# Altium PCB PCB1.PcbDoc
Units mm, origin at the board's own origin, x right, y up, seen from the top; angles counter-clockwise.
Board outline 32 x 86 mm, 2 copper layers (Top Layer, Bottom Layer); 78 components, 52 nets, 247 pads, 30 vias.
Unrouted connection lines stored in the file: 5.
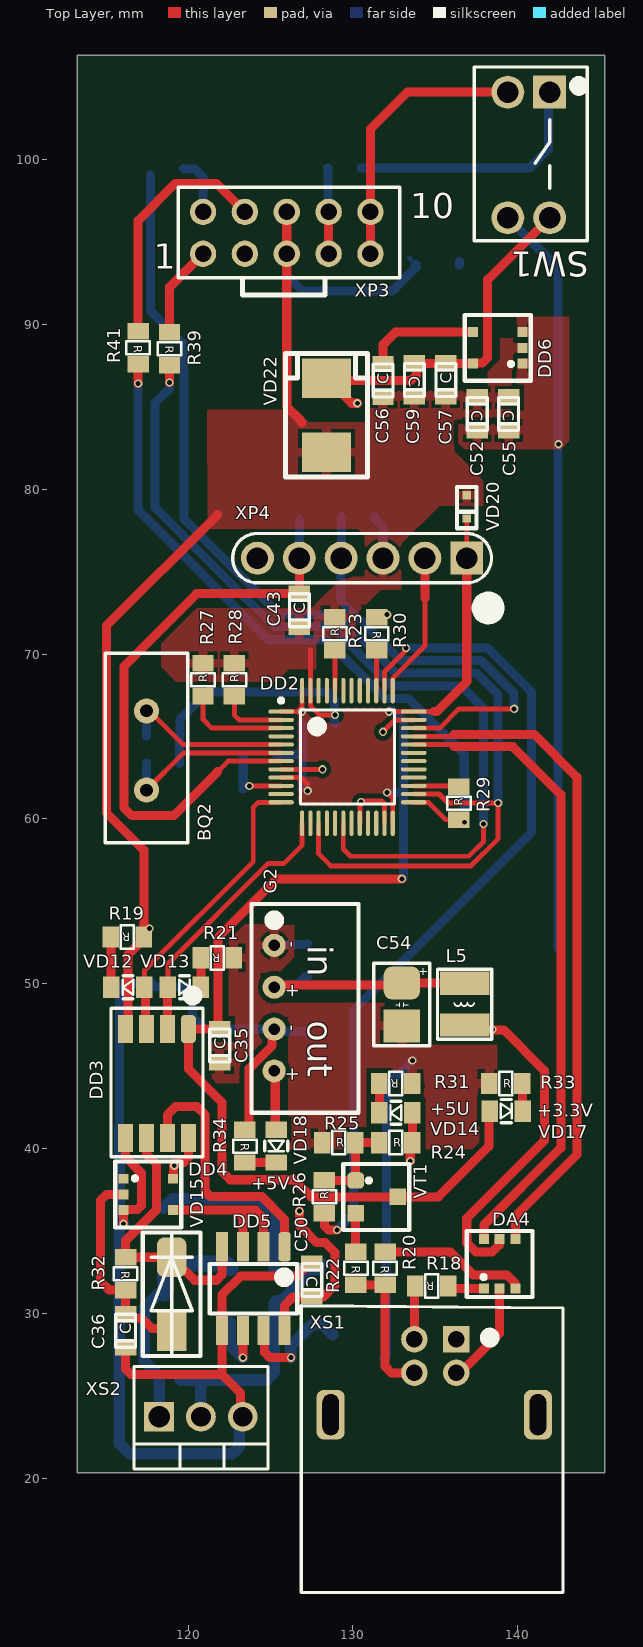
[diagram p0: Top Layer view]
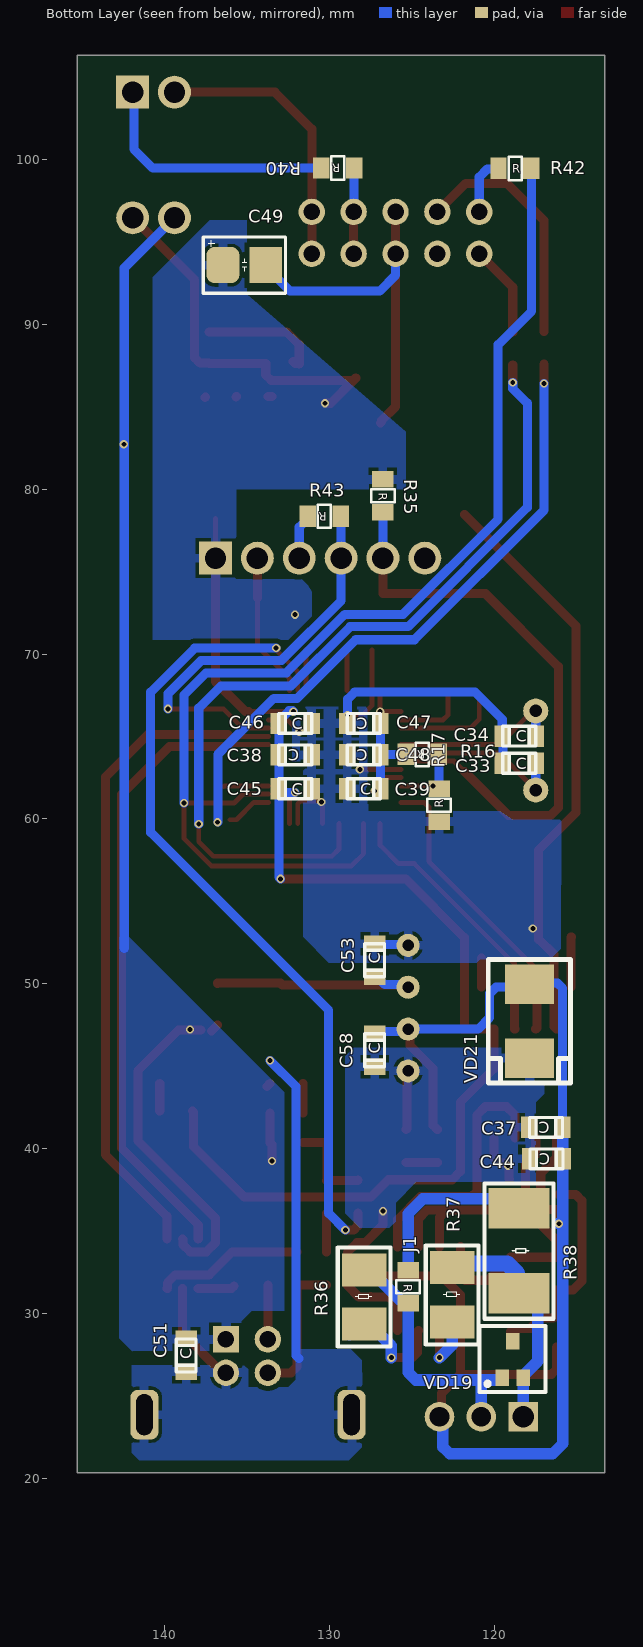
[diagram p1: Bottom Layer view, seen from below]
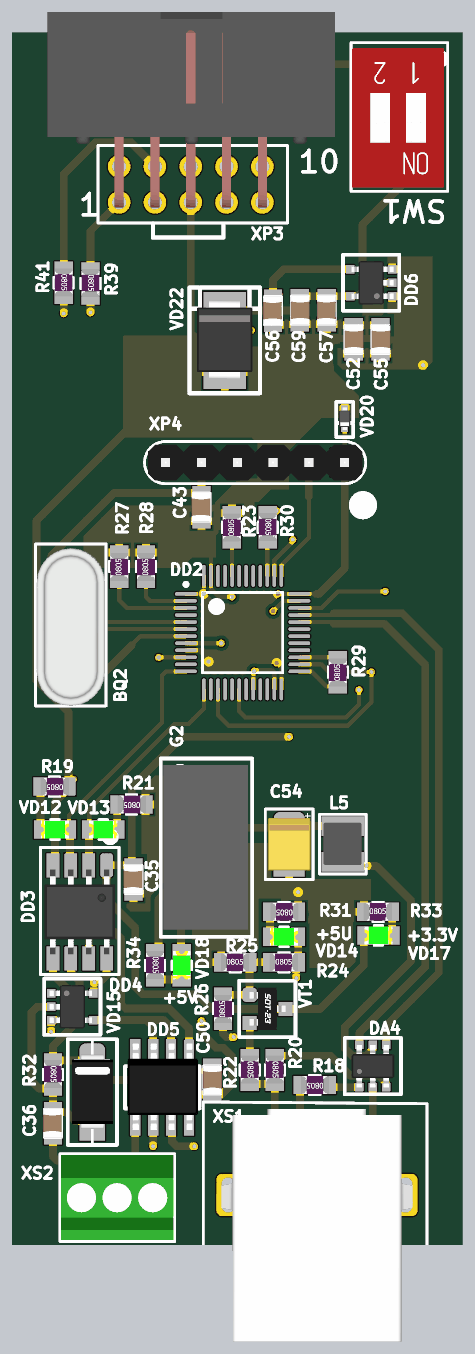
[diagram p2: 3D render of the assembled board from above, using the file's embedded part models]
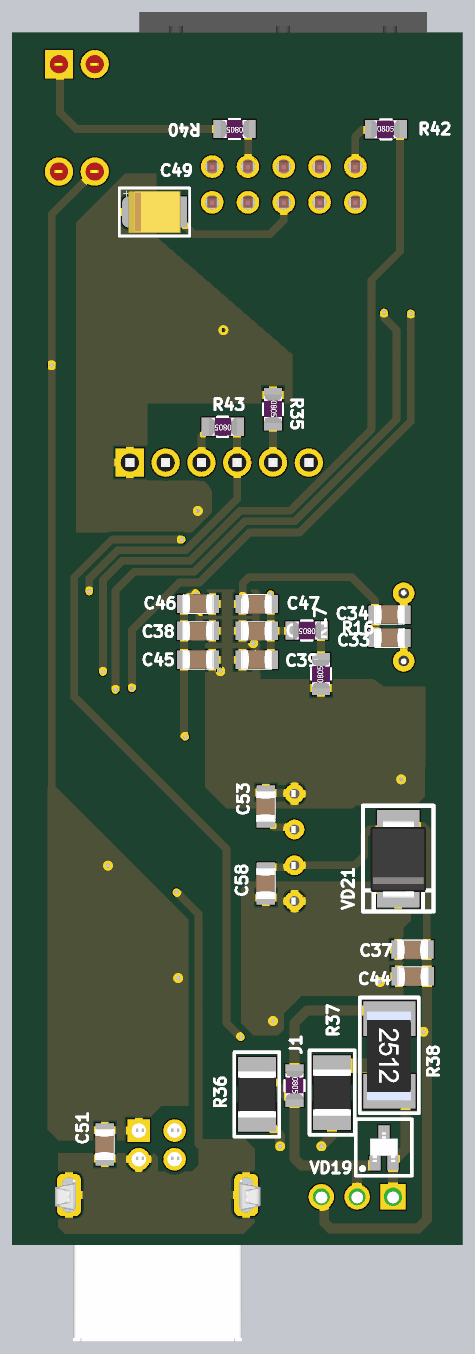
[diagram p3: 3D render of the assembled board from below, using the file's embedded part models]

## Layer stack, top to bottom
Top Solder: solder mask 0.0102, Solder Resist, Dk 3.5
Top Layer: signal copper 0.0356
Dielectric 1: dielectric 0.32, FR-4, Dk 4.8
Bottom Layer: signal copper 0.0356
Bottom Solder: solder mask 0.0102, Solder Resist, Dk 3.5

## Board outline
113.284,20.32 113.284,106.32 145.284,106.32 145.284,20.32

## Design rules (kind name [scope] priority, off if disabled: settings)
Clearance [All] p1: gap=0.2 ignorepadtopadclearanceinfootprint=FALSE except(0.3: Arc-Poly Track-Poly SMDPad-Poly THPad-Poly Via-Poly Fill-Poly Poly-Poly)
MinimumSolderMaskSliver [All] p1: minsoldermaskwidth=0
PolygonConnect [All] p1: thpad.connectstyle=Relief thpad.reliefconductorwidth=0.55 thpad.reliefentries=4 thpad.polygonreliefangle="90 Angle" thpad.airgapwidth=0.2 smdpad.connectstyle=Relief smdpad.reliefconductorwidth=0.55 smdpad.reliefentries=4 smdpad.polygonreliefangle="90 Angle" smdpad.airgapwidth=0.2 via.connectstyle=Direct via.reliefconductorwidth=0.55 via.reliefentries=4 via.polygonreliefangle="90 Angle" via.airgapwidth=0.2
RoutingVias [All] p1: holewidth=0.711 width=1.27 viastyle="Through Hole" minholewidth=0.711 minwidth=1.27 maxholewidth=0.711 maxwidth=1.27
SilkToSilkClearance [All] p1: silktosilkclearance=0
SilkToSolderMaskClearance [IsPad] p1: minsilkscreentomaskgap=0 clearancetoexposedcopper=TRUE
SolderMaskExpansion [All] p1: expansion=0.102
Width [All] p1: maxlimit=1 minlimit=0.3 preferedwidth=0.55 minimp=50.000000 maximp=50.000000 favimp=50.000000
27 further rules are at their usual default settings.

## Components (designator, comment, footprint, x,y, rotation, side; value= is the part's Value field where it differs from the comment)
BQ2 "8Mhz" Xtal 117.475,66.548 r270 top
C33 "" CAP_0805_(2x1.25x1.3) 119.475,63.373 r180 bottom
C34 "" CAP_0805_(2x1.25x1.3) 119.475,65.024 r180 bottom
C35 "0805" CAP_0805_(2x1.25x1.3) 121.92,45.244 r90 top
C36 "0805" CAP_0805_(2x1.25x1.3) 116.205,27.94 r90 top locked
C37 "0805" CAP_0805_(2x1.25x1.3) 115.856,41.275 r0 bottom locked
C38 "0.1u" CAP_0805_(2x1.25x1.3) 131.064,63.881 r0 bottom
C39 "0.1u" CAP_0805_(2x1.25x1.3) 128.905,61.826 r180 bottom
C43 "0.1u" CAP_0805_(2x1.25x1.3) 126.746,71.66 r90 top
C44 "0805" CAP_0805_(2x1.25x1.3) 115.824,39.37 r0 bottom locked
C45 "10n" CAP_0805_(2x1.25x1.3) 133.064,61.826 r180 bottom
C46 "10n" CAP_0805_(2x1.25x1.3) 133.064,65.786 r180 bottom
C47 "1u" CAP_0805_(2x1.25x1.3) 126.905,65.786 r0 bottom
C48 "1u" CAP_0805_(2x1.25x1.3) 126.905,63.881 r0 bottom
C49 "TAN_A" CAP_TAN_B 136.458,93.599 r180 bottom
C50 "0805" CAP_0805_(2x1.25x1.3) 127.508,33.02 r270 top
C51 "0.1u" CAP_0805_(2x1.25x1.3) 138.684,26.441 r90 bottom
C52 "0805" CAP_0805_(2x1.25x1.3) 137.541,85.566 r270 top
C53 "1u" CAP_0805_(2x1.25x1.3) 127.254,50.419 r90 bottom
C54 "TAN_A" CAP_TAN_B 132.969,50.038 r270 top
C55 "0805" CAP_0805_(2x1.25x1.3) 139.446,85.566 r270 top
C56 "0805" CAP_0805_(2x1.25x1.3) 131.826,85.598 r90 top
C57 "0805" CAP_0805_(2x1.25x1.3) 135.636,85.63 r90 top
C58 "1u" CAP_0805_(2x1.25x1.3) 127.254,44.958 r90 bottom
C59 "1u" CAP_0805_(2x1.25x1.3) 133.727,87.63 r270 top
DA4 "DA_USBLC6-2SC6" SOT-23-6L 137.953,31.496 r0 top
DD2 "DD_STM32F103CBT6" LQFP_48 129.667,63.754 r0 top
DD3 "SCM3721ASA" SOP-8 120.015,47.244 r270 top locked
DD4 "74HC1G14GV" sot-23-5 116.078,38.161 r270 top locked
DD5 "ST3485EBDR" SO-8_(0.15') 125.817,34.086 r270 top locked
DD6 "LD3985M33R" sot-23-5 140.287,87.63 r90 top
G2 "AM1S-Z" AM1S-Z 125.222,52.324 r270 top
J1 "0805" RES_0805_(2x1.2x0.45)_0.125Вт 125.222,32.612 r270 bottom locked
L5 "SRN3015-100M" L_SRN3015 136.779,47.498 r90 top
R16 "0805" RES_0805_(2x1.2x0.45)_0.125Вт 123.349,63.906 r0 bottom
R17 "0805" RES_0805_(2x1.2x0.45)_0.125Вт 123.342,59.824 r90 bottom
R18 "0805" RES_0805_(2x1.2x0.45)_0.125Вт 135.782,31.655 r180 top
R19 "0805" RES_0805_(2x1.2x0.45)_0.125Вт 117.316,52.832 r180 top
R20 "0805" RES_0805_(2x1.2x0.45)_0.125Вт 131.953,33.723 r270 top
R21 "0805" RES_0805_(2x1.2x0.45)_0.125Вт 122.777,51.562 r180 top
R22 "0805" RES_0805_(2x1.2x0.45)_0.125Вт 130.175,33.723 r270 top
R23 "0805" RES_0805_(2x1.2x0.45)_0.125Вт 128.905,70.231 r90 top
R24 "0805" RES_0805_(2x1.2x0.45)_0.125Вт 131.604,40.359 r0 top
R25 "0805" RES_0805_(2x1.2x0.45)_0.125Вт 128.143,40.359 r0 top
R26 "0805" RES_0805_(2x1.2x0.45)_0.125Вт 128.27,36.073 r90 top
R27 "0805" RES_0805_(2x1.2x0.45)_0.125Вт 120.904,67.437 r90 top
R28 "0805" RES_0805_(2x1.2x0.45)_0.125Вт 122.809,67.437 r90 top
R29 "0805" RES_0805_(2x1.2x0.45)_0.125Вт 136.423,59.951 r90 top
R30 "0805" RES_0805_(2x1.2x0.45)_0.125Вт 131.445,72.231 r270 top
R31 "3.3k" RES_0805_(2x1.2x0.45)_0.125Вт 133.604,43.942 r180 top
R32 "0805" RES_0805_(2x1.2x0.45)_0.125Вт 116.205,33.401 r270 top locked
R33 "0805" RES_0805_(2x1.2x0.45)_0.125Вт 138.278,43.942 r0 top
R34 "3.3k" RES_0805_(2x1.2x0.45)_0.125Вт 123.444,41.148 r270 top
R35 "0805" RES_0805_(2x1.2x0.45)_0.125Вт 126.746,80.613 r270 bottom
R36 "1210" RES_1210_(3.2x2.5x0.55)_0.5Вт 127.889,29.339 r90 bottom locked
R37 "1210" RES_1210_(3.2x2.5x0.55)_0.5Вт 122.555,29.464 r90 bottom locked
R38 "2512" RES_2512_(6.3x3.1x0.6)_2Вт 118.491,36.365 r270 bottom locked
R39 "0805" RES_0805_(2x1.2x0.45)_0.125Вт 118.872,89.535 r270 top
R40 "0805" RES_0805_(2x1.2x0.45)_0.125Вт 128.486,99.488 r0 bottom
R41 "0805" RES_0805_(2x1.2x0.45)_0.125Вт 116.967,89.583 r270 top
R42 "0805" RES_0805_(2x1.2x0.45)_0.125Вт 119.736,99.466 r180 bottom
R43 "0805" RES_0805_(2x1.2x0.45)_0.125Вт 129.318,78.359 r0 bottom
SW1 "SW_2_pin" SW_DS1040_2pin 134.315,104.089 r0 top locked
VD12 "VD_Led_0805" led_0805 117.348,49.784 r180 top
VD13 "VD_Led_0805" led_0805 118.777,49.784 r0 top
VD14 "VD_Led_0805" led_0805 133.604,42.164 r180 top
VD15 "VD" VD_SMA_(Do-214AC) 118.999,28.901 r90 top locked
VD17 "VD_Led_0805" led_0805 138.303,42.266 r0 top
VD18 "VD_Led_0805" led_0805 125.349,41.148 r270 top
VD19 "ESDA25W" SOT-323-3L 119.888,25.974 r180 bottom locked
VD20 "ESD" VD_SOD523 136.906,79.629 r270 top
VD21 "SMBJ5.0A" VD_SMB_(Do-214AA) 117.856,49.966 r270 bottom
VD22 "SMBJ5.0A" VD_SMB_(Do-214AA) 128.397,82.241 r90 top
VT1 "BC847B" SOT-23 130.165,38.057 r270 top
XP3 "XP_5x2_H" XP_5x2_PIN_H 120.904,94.285 r0 top locked
XP4 "XP_6_pin" XP_6_Pin 136.906,75.819 r180 top
XS1 "XS_USB_B" XS_USBB 133.731,28.421 r0 top locked
XS2 "XS_3_pin_2.54" XS_KLS-2.54-03P 118.237,23.722 r0 top locked

## Footprints (in the part's own frame and the unit in brackets; to place one, negate y for a bottom-side part, rotate by r counter-clockwise, add the part's x,y. Pads: shape width x height; smd on the part's side, far side on the other; paste and mask are expansions set on the pad)
AM1S-Z [mm] "DC/DC Aimtec"
  round 1.4 hole 0.701: 1(0,0) 2(2.54,0) 3(5.08,0) 4(7.62,0)
  silkscreen extent -2.5,-1.38 10.16,5.12, body extent -2.03,-1.17 9.65,4.83, height 10.35
CAP_0805_(2x1.25x1.3) [mm]
  rect 1x1.3 smd: 1(0,0) 2(2,0)
  silkscreen extent 0,-0.6 2,0.6, body extent -0.05,-0.65 2.05,0.7, height 0.95
CAP_TAN_B [mm]
  rrect50% 2x2.2 smd: 1(0,0)
  rect 2x2.2 smd: 2(2.6,0)
  silkscreen extent -1.2,-1.7 3.8,1.7, body extent -0.55,-1.5 3.15,1.5, height 2.1
L_SRN3015 [mm]
  rect 1.4x3 smd: 1(0,0) 2(2.525,0)
  silkscreen extent -0.87,-1.65 3.37,1.65, body extent -0.24,-1.34 2.78,1.39, height 1.5
led_0805 [mm]
  rect 1x1.3 smd: 1(0,0) 2(2,0)
  silkscreen extent 0.67,-0.7 1.32,0.7, body extent 0,-0.62 2,0.62, height 1.1
LQFP_48 [mm] "Thin QFP, 48-Leads, Body 7x7mm, Pitch 0.5mm, IPC High Density"
  oval 1.55x0.25 smd: 1(-4.025,2.75) 2(-4.025,2.25) 3(-4.025,1.75) 4(-4.025,1.25) 5(-4.025,0.75) 6(-4.025,0.25) 7(-4.025,-0.25) 8(-4.025,-0.75) 9(-4.025,-1.25) 10(-4.025,-1.75) 11(-4.025,-2.25) 12(-4.025,-2.75) 25(4.025,-2.75) 26(4.025,-2.25) 27(4.025,-1.75) 28(4.025,-1.25) 29(4.025,-0.75) 30(4.025,-0.25) 31(4.025,0.25) 32(4.025,0.75) 33(4.025,1.25) 34(4.025,1.75) 35(4.025,2.25) 36(4.025,2.75)
  oval 0.25x1.55 smd: 13(-2.75,-4.025) 14(-2.25,-4.025) 15(-1.75,-4.025) 16(-1.25,-4.025) 17(-0.75,-4.025) 18(-0.25,-4.025) 19(0.25,-4.025) 20(0.75,-4.025) 21(1.25,-4.025) 22(1.75,-4.025) 23(2.25,-4.025) 24(2.75,-4.025) 37(2.75,4.025) 38(2.25,4.025) 39(1.75,4.025) 40(1.25,4.025) 41(0.75,4.025) 42(0.25,4.025) 43(-0.25,4.025) 44(-0.75,4.025) 45(-1.25,4.025) 46(-1.75,4.025) 47(-2.25,4.025) 48(-2.75,4.025)
  silkscreen extent -4.15,-2.85 2.85,3.55, body extent -3.5,-3.5 3.5,3.5, height 1.6
RES_0805_(2x1.2x0.45)_0.125Вт [mm]
  rect 1x1.3 smd: 1(0,0) 2(2,0)
  silkscreen extent 0.61,-0.71 1.4,0.71, body extent -0.02,-0.62 1.98,0.63, height 0.61
RES_1210_(3.2x2.5x0.55)_0.5Вт [mm]
  rect 2x2.7 smd: 1(0,0) 2(3.3,0)
  silkscreen extent -1.35,-1.6 4.65,1.6, body extent 0,-1.35 3.3,1.35, height 0.6
RES_2512_(6.3x3.1x0.6)_2Вт [mm]
  rect 2.45x3.7 smd: 1(0,0) 2(5.15,0)
  silkscreen extent -1.5,-2.1 6.7,2.1, body extent -0.51,-1.6 5.79,1.55, height 0.82
SO-8_(0.15') [mm]
  rrect50% 1.78x0.73 smd: 1(0.05,0.04)
  rect 1.78x0.73 smd: 2(0.05,-1.23) 3(0.05,-2.5) 4(0.05,-3.77) 5(5.13,-3.77) 6(5.13,-2.5) 7(5.13,-1.23) 8(5.13,0.04)
  silkscreen extent 1.1,-4.5 4.1,0.8, body extent -0.53,-4.32 5.63,0.68, height 2
SOP-8 [mm]
  rrect50% 1.7x0.9 smd: 1(0,0)
  rect 1.7x0.9 smd: 2(0,-1.27) 3(0,-2.54) 4(0,-3.81) 5(6.604,-3.81) 6(6.604,-2.54) 7(6.604,-1.27) 8(6.604,0)
  silkscreen extent -2.33,-4.7 7.75,0.89, body extent 0.28,-4.42 6.32,0.61, height 1.6
SOT-23 [mm]
  rrect50% 1x1 smd: 1(0,0)
  rect 1x1 smd: 2(2,0) 3(1,2.55)
  silkscreen extent -1,-0.75 3,3.25, body extent -0.5,0 2.5,2.55, height 1
sot-23-5 [mm]
  rect 0.6x0.6 smd: 1(0,0) 2(0.95,0) 3(1.9,0) 4(1.9,3) 5(0,3)
  silkscreen extent -1.05,-0.5 2.95,3.5, body extent -0.6,-0.1 2.5,3.1, height 1.45
SOT-23-6L [mm]
  rect 0.6x0.6 smd: 1(0,0) 2(0.95,0) 3(1.9,0) 4(1.9,3) 5(0.95,3) 6(0,3)
  silkscreen extent -1.05,-0.5 2.95,3.5, body extent -0.57,0 2.47,3, height 1.45
SOT-323-3L [mm]
  rect 0.8x1 smd: 1(0.381,0.127) 2(1.651,0.127) 3(1.016,2.32)
  silkscreen extent -1,-0.75 3,3.25, body extent 0.02,0.22 2.02,2.32, height 0.9
SW_DS1040_2pin [mm] "Switch"
  rect 2x2 hole 1.3: 1(7.62,0)
  round 2 hole 1.3: 2(5.08,0) 3(5.08,-7.62) 4(7.62,-7.62)
  silkscreen extent 3.05,-9.02 9.91,1.52, body extent 3.11,-8.76 9.65,1.14, height 6.8
VD_SMA_(Do-214AC) [mm]
  rect 2.4x1.8 smd: 1(0,0)
  rrect50% 2.4x1.8 smd: 2(4.5,0)
  silkscreen extent -1.5,-1.75 6,1.75, body extent -0.37,-1.47 4.92,1.45, height 2.41
VD_SMB_(Do-214AA) [mm]
  rect 2.4x3 smd: 1(0,0) 2(4.5,0)
  silkscreen extent -1.5,-2.5 6,2.5, body extent -0.5,-1.97 5.1,1.98, height 2.65
VD_SOD523 [mm]
  rect 0.5x0.5 smd: 1(0,0) 2(1.4,0)
  silkscreen extent -0.5,-0.6 2,0.6, body extent -0.1,-0.4 1.5,0.4, height 0.7
XP_5x2_PIN_H [mm]
  round 1.6 hole 1: 1(0,0) 2(0,2.54) 3(2.54,0) 4(2.54,2.54) 5(5.08,0) 6(5.08,2.54) 7(7.62,0) 8(7.62,2.54) 9(10.16,0) 10(10.16,2.54)
  silkscreen extent -1.5,-2.5 11.94,4.04, body extent -5.07,-0.36 15.33,13.52, height 9.35
XP_6_Pin [mm]
  rect 2x2 hole 1.3: 1(0,0)
  round 2 hole 1.3: 2(2.54,0) 3(5.08,0) 4(7.62,0) 5(10.16,0) 6(12.7,0)
  silkscreen extent -1.5,-1.5 14.2,1.5, body extent -1.27,-1.27 13.97,1.27, height 9.05
XS_KLS-2.54-03P [mm]
  rect 1.8x1.8 hole 1.3: 1(0,0)
  round 1.8 hole 1.2: 2(2.54,0) 3(5.08,0)
  silkscreen extent -1.52,-3.17 6.6,3.05, body extent -1.46,-3.05 6.54,2.97, height 7.83
XS_USBB [mm]
  rect 1.6x1.6 hole 1: 1(2.54,0)
  round 1.6 hole 1: 2(0,0) 3(0,-2.032) 4(2.54,-2.032)
  rrect50% 1.7x3 hole 2.5 slot 1 at 0 deg: 5(7.493,-4.572) 6(-5.08,-4.572)
  silkscreen extent -6.86,-15.37 9.02,2.03, body extent -6.1,-14.98 8.5,1.52, height 11.28
Xtal [mil]
  round 60 hole 30: 1(0,0) 2(188.98,0)
  silkscreen extent -138,-98 315,98, body extent -126,-95 315,95, height 157

## Part data
BQ2: library part Xtal, Наименование=8.00M-HC49-S
C33 C34 C35 C36 C37 C38 C39 C43 C44 C45 C46 C47 C48 C50 C51 C52 C53 C55 C56 C57 C58 C59: library part C_0805, "Керамика", Корпус=0805, Тип=Конденсатор
  C33 C34: Напряжение="50 В", Номинал=20pF
  C35 C37 C44 C50: Наименование=VJ0805Y104KXACW1BC, Номинал=0.1uF
  C36: Наименование=GRM216R71H102K, Номинал=1nF
  C38: Идентификатор=VJ0805Y104KXACW1BC, Наименование=VJ0805Y104KXACW1BC, Напряжение="50 В", Номинал=0.1u, Примечания=VJ0805Y104KXACW1BC
  C39 C43 C51: Идентификатор=VJ0805Y104KXACW1BC, Наименование=VJ0805Y104KXACW1BC, Напряжение="50 В", Номинал=0.1u
  C45 C46: Идентификатор=CC0805JRX7R9BB103, Наименование=CC0805JRX7R9BB103, Напряжение="50 В", Номинал=10n
  C47 C48: Идентификатор=CC0805JKX7R9BB105, Наименование=CC0805JRX7R9BB103, Напряжение="50 В", Номинал=1u
  C52: Наименование=CC0805JKX7R9BB105, Номинал=1uF
  C53 C58 C59: Идентификатор=CC0805JKX7R9BB105, Наименование=CC0805JKX7R9BB105, Напряжение="50 В", Номинал=1u
  C55 C57: Наименование=VJ0805Y104KXACW1BC, Номинал=100nF
  C56: Наименование=CC0805JRX7R9BB103, Номинал=10nF
C49 C54: library part C+_TAN_B, "Capacitor", Идентификатор=293D226X9010A2TE3, Корпус=A, Наименование=293D226X9010A2TE3, Напряжение="10 В", Номинал=22u, Тип="Конденсатор танталовый"
DA4: "USB ESD protector SOT23-6", Идентификатор=USBLC6-2SC6, Корпус=SOT23-6, Наименование=USBLC6-2SC6, Тип="ESD protector"
DD2: "STM32 ARM-based 32-bit MCU with 128 Kbytes Flash, 48-pin LQFP, Industrial Temperature", ComponentLink1Description="Manufacturer Link", ComponentLink1URL=www.st.com/stm32, ComponentLink2Description=Datasheet, ComponentLink2URL=http://www.st.com/stonline/products/literature/ds/13587.pdf, DatasheetVersion="rev6, Mar-2008", PackageDescription="48-Pin Low-Profile Quad Flat Pack, 7 x 7 mm Body, 0.5 mm Pitch (LQFP48)", PackageReference=LQFP48, PackageVersion=Mar-2008, Published=30-May-2008, Publisher="Altium Limited", Наименование=STM32F103CBT6
DD3: library part DD_SCM3721ASA, "Dual-ChannelDigital Isolators", Идентификатор=SCM3721ASA, Наименование=SCM3721ASA, Тип=SCM3721ASA
DD4: library part DD_74HC1G14GV, "1 канал инвертирующ триггер шмитта", Parameter 1=74HC1G14GV, Наименование=74HC1G14GV
DD5: library part DD_ST3485EBDR, "RS485/422 Приемопередатчик интерфейса", Наименование=ST3485EBDR, Тип=ST3485EBDR
DD6: library part DD_LD3985M33R, "Источник опорного напряжения 3.3В", Parameter 1=74HC1G14GV, Наименование=LD3985M33R
G2: library part G_AM1S-Z, "DC/DC", Идентификатор=B0505S-1WR3, Наименование=B0505S-1WR3, Напряжение="5 В", Тип="Источник питания DC/DC"
J1 R16 R17 R18 R19 R20 R21 R22 R23 R24 R25 R26 R27 R28 R29 R30 R31 R32 R33 R34 R35 R39 R40 R41 R42 R43: library part R_0805, "Resistor", Корпус=0805, Тип=Резистор
  J1 R39 R40 R41 R42: Идентификатор=-, Наименование=RC0805JR-0722RL, Номинал=22
  R16 R17: Идентификатор=-, Наименование=RC0805JR-074K7L, Номинал=4.7k
  R18 R20: Идентификатор=RC0805JR-070RL, Наименование=RC0805JR-070RL, Номинал=0
  R19 R21 R22 R33: Идентификатор=RC0805JR-071K5L, Наименование=RC0805JR-071K5L, Номинал="1.5 k"
  R23: Идентификатор=-, Наименование=RC0805JR-07100KL, Номинал=100k
  R24: Идентификатор=-, Наименование=RC0805JR-0710KL, Номинал="10 k"
  R25: Идентификатор=RC0805JR-0736KL, Наименование=RC0805JR-0736KL, Номинал="36 k"
  R26 R29: Идентификатор=-, Наименование=RC0805JR-07100RL, Номинал=100
  R27 R28: Идентификатор=-, Наименование=RC0805JR-0710KL, Номинал=10k
  R30: Идентификатор=-, Наименование=RC0805JR-070RL, Номинал=0
  R31: Идентификатор=RC0805JR-073K3L, Наименование=RC0805JR-073K3L, Номинал=3.3k
  R32: Наименование=RC0805JR-0722KL, Номинал=22k
  R34: Идентификатор=RC0805JR-073K3L, Наименование=RC0805JR-073K3L, Номинал="3.3 k"
  R35 R43: Идентификатор=RC0805JR-0710KL, Наименование=RC0805JR-0710KL, Номинал="10 k"
L5: library part L_SRN3015, "L", Идентификатор=SRN3015-100M, Наименование=SRN3015-100M, Номинал="10 мкГн, 1 А", Тип=Индуктивность
R36 R37: library part R_1210, "Resistor", Корпус=1210, Наименование=RC1210JR-072R7L, Номинал=2,7, Тип=Резистор
R38: library part R_2512, Корпус=2512, Наименование=RC2512JR-07120RL, Номинал=120, Тип=Резистор
VD15: "Diode", Идентификатор=1N4148, Наименование=1N4148
VD19: library part VD_ESDA25W, "Защитный биполярный диод", Корпус=SOT323, Наименование=ESDA25W, Тип=ESDA25W
VD20: library part VD_ESD, "Защитный диод", Идентификатор=ESD5Z3.3T1G, Корпус=SOD523, Наименование=ESD5Z3.3T1G, Напряжение="3.3 В", Тип="Защитный диод"
VD21 VD22: library part VD_SMBJ50A, "Защитный диод 600W 5V 5% [SMB]", Идентификатор=SMBJ5.0A, Корпус=SMB, Наименование=SMBJ50A, Напряжение="5 В", Тип="Защитный диод"
VT1: library part VT_BC847B, "NPN Bipolar Transistor", Идентификатор=BC847B, Наименование=BC847B
SW1: Идентификатор=DS1040-02RN, Наименование=DS1040-02RN
VD12 VD13: Идентификатор=BL-LS0805PGC, Корпус=0805, Наименование=BL-LS0805PGC, Примечания=Зеленый, Тип="Светодиод (Зеленый)"
VD14 VD17 VD18: Идентификатор=BL-LS0805UHR, Корпус=0805, Наименование=BL-LS0805UHR, Примечания=Красный, Тип="Светодиод (Красный)"
XP3: Наименование=BH10R
XP4: Идентификатор=PLS-6, Наименование=PLS-6, Тип="Вилка штырьевая (2.54)"
XS1: Наименование=USB-B
XS2: Идентификатор=DG308-2.54-03P, Наименование=DG308-2.54-03P

## Via types
v1: diameter 0.5, hole 0.3, Top Layer to Bottom Layer, 30 vias

## Nets (pads, with @x,y where several pads share a name; then routed paths per layer and width w, separated by ;. In a path a pad name is that pad's centre, name@x,y a point inside that pad or via, vN(x,y) a via of type N, cw(c..) or ccw(c..) an arc to the next point about the centre after c; other vN are vias at no path point)
+3V: C35.2 C38.2 C39.2 C45.1 C46.1 C47.1 C48.1 C49.1 C57.2 C59.1 DD2.1 DD2.9 DD2.24 DD2.36 DD2.48 DD3.1 DD6.5 R16.2 R30.1 R35.1 SW1.4 VD17.1 VD20.2 VD22.2 VT1.3 XP4.1 | length 112.1
  Top Layer w0.3: DD2.9 126.853,62.504 127.254,62.103 ; DD2.1 v1(126.917,66.504) DD2.48 ; v1(132.08,61.595) 132.417,61.258 DD2.24 ; v1(132.183,66.504) DD2.36 134.913,66.504 ; XP4.1 VD20.2
  Top Layer w0.55: VD22.2 VD22.2@128.533,86.605 ; v1(130.266,85.217) 129.921,85.217 VD22.2@128.533,86.605 ; v1(132.969,56.363) 125.374,56.363 121.802,52.79 121.802,47.362 C35.2 DD3.1 120.015,44.831 122.047,42.799 122.047,38.608 122.555,38.1 126.421,38.1 127.464,37.057 VT1.3 135.177,37.057 138.252,40.132 138.252,42.215 VD17.1 ; 134.913,66.504 135.084,66.504 136.906,68.326 XP4.1 ; SW1.4 138.176,92.71 138.176,87.977 137.854,87.655 137.312,87.655 DD6.5 C57.2 133.858,87.63 133.858,86.927 133.536,86.605 VD22.2@128.533,86.605
  Bottom Layer w0.55: R16.2 125.362,63.894 126.892,63.894 C48.1 ; C39.2 C48.1 ; C47.1 C48.1 ; v1(132.08,61.595) C45.1@132.839,61.595 ; v1(132.183,66.504) 132.239,66.56 132.44,66.56 133.064,65.936 C46.1 C38.2 C45.1 133.064,56.458 v1(132.969,56.363) ; C49.1 C49.1@136.458,93.821
  other v1: 127.254,61.699 132.08,72.39
+5: C51.2 C52.2 C55.2 DA4.5 DD6.1 DD6.3 L5.1 R24.2 SW1.3 VD14.1 XS1.1 | length 69.1
  Top Layer w0.55: v1(133.477,39.243) 133.477,40.232 R24.2 VD14.1 ; L5.1 L5.1@137.152,47.125 ; L5.1@137.795,47.193 139.141,47.193 141.617,44.717 141.617,40.474 136.906,35.763 136.906,34.271 137.456,33.721 138.45,33.721 138.878,34.149 138.878,34.471 DA4.5
  Bottom Layer w0.55: SW1.3 142.443,93.421 142.443,52.146
  other v1: 138.455,47.219 142.469,82.728
+5V: C37.2 C44.2 C50.2 C58.1 DD3.8 DD4.5 DD5.8 G2.4 VD18.1 VD21.2 | length 17.6
  Top Layer w0.55: DD4.5 119.103,38.186 119.103,39.093 119.126,39.116 119.693,39.116 120.015,39.438 DD3.8 ; G2.4 125.285,44.64 125.285,41.212 VD18.1 ; DD5.8 125.857,30.48 126.365,30.988 127.476,30.988 C50.2 127.54,30.988 128.202,30.988 128.905,31.691 128.905,33.696 128.311,34.29 127.813,34.29 126.746,35.357 v1(126.746,36.195)
  other v1: 119.158,38.957
AIN: DD2.10 R16.1 R17.2 | length 4
  Top Layer w0.3: v1(123.712,61.99) 123.726,62.004 DD2.10
  Bottom Layer w0.55: R17.2 123.346,61.827 123.346,63.903 R16.1
GND1: C33.1 C34.1 C35.1 C38.1 C39.1 C43.1 C45.2 C46.2 C47.2 C48.2 C49.2 C51.1 C52.1 C53.2 C54.2 C55.1 C56.1 C57.1 C59.2 DA4.2 DD2.8 DD2.20 DD2.23 DD2.35 DD2.47 DD3.4 DD6.2 G2.1 R17.1 R19.1 R21.1 R23.2 R25.1 R27.2 R28.2 R31.1 R33.1 R43.2 VD20.1 VD22.1 XP3.5 XP3.6 XP4.3 XS1.4 XS1.5 XS1.6 | length 118.5
  Top Layer w0.3: DD2.8 v1(128.15,63.004) ; 127.417,70.231 DD2.47 127.417,66.862 127.985,66.294 v1(128.905,66.294) ; R23.2 R23.2@129.055,72.231 ; DD2.20 130.417,60.948 v1(130.487,61.018) 130.556,61.087 131.741,61.087 131.917,60.911 DD2.23 ; v1(131.826,65.278) 132.552,66.004 DD2.35
  Top Layer w0.55: DD3.4 116.357,47.396 116.357,51.769 117.293,52.705 R19.1@117.316,52.682 ; R19.1 117.316,58.096 115.037,60.376 115.037,71.704 121.793,78.461 ; XP3.6 XP3.5 125.984,85.014 126.822,84.176 126.822,84.099 126.898,84.023 ; C59.2@133.473,85.63 C59.2 ; R31.1 R31.1@133.794,43.752 ; C57.1 C57.1@135.668,85.598 ; XS1.4 136.511,26.389 138.903,28.781 DA4.2 ; C52.1@137.509,85.598 C52.1
  Bottom Layer w0.3: C49.2@133.427,94.03 C49.2@133.506,93.951
  Bottom Layer w0.55: C33.1 C34.1 119.507,65.056 119.507,66.04 121.158,67.691 128.456,67.691 128.886,67.261 128.886,65.805 C47.2 ; G2.1 125.27,52.372 127.206,52.372 C53.2 ; XP3.5 125.984,92.989 126.949,92.024 132.383,92.024 133.858,93.499 C49.2 C49.2@133.809,93.648 ; XS1.6 XS1.6@128.651,24.499 ; R43.2 131.318,78.209 131.826,77.701 XP4.3 ; 131.851,27.268 132.029,27.445 132.029,43.764 v1(133.604,45.339)
  other v1: 117.653,53.34
GND2: C36.1 C37.1 C44.1 C50.1 C58.2 DD3.5 DD4.3 DD5.5 G2.3 R34.1 VD21.1 XS2.3 | length 86.4
  Top Layer w0.55: v1(116.078,35.433) DD4.3 116.103,36.286 116.906,36.286 117.17,36.551 117.17,38.506 116.205,39.472 DD3.5 ; C36.1 116.205,26.611 116.527,26.289 122.047,26.289 ; XS2.3 123.19,23.849 123.19,25.146 122.047,26.289 ; R34.1 123.698,41.402 123.698,44.842 125.095,46.239 125.095,47.117 G2.3 ; C50.1@127.508,33.17 126.596,32.258 123.19,32.258 122.047,31.115 DD5.5 122.047,26.289
  Bottom Layer w0.55: C37.1@115.84,41.259 115.84,49.716 116.162,50.038 117.784,50.038 VD21.1 118.038,49.784 119.888,49.784 120.269,49.403 120.269,47.947 120.972,47.244 G2.3 125.365,47.101 127.111,47.101 C58.2
  Bottom Layer w0.7: C37.1 115.84,41.259 115.84,39.386 C44.1 115.824,35.687 ; v1@116.091,35.42 v1(116.078,35.433) 115.824,35.687 ; XS2.3@123.444,23.595 XS2.3 123.107,23.512 123.107,21.888 122.682,21.463 116.459,21.463 115.824,22.098 115.824,35.433 115.824,35.687
NetBQ2_1: BQ2.1 C34.2 DD2.5 | length 10.6
  Top Layer w0.3: BQ2.1@117.475,66.014 117.831,66.37 119.697,64.504 DD2.5
  Bottom Layer w0.55: C34.2 BQ2.1
NetBQ2_2: BQ2.2 C33.2 DD2.6 | length 11.3
  Top Layer w0.3: BQ2.2@117.475,61.214 BQ2.2 119.731,64.004 DD2.6
  Bottom Layer w0.55: BQ2.2 C33.2
NetC36_2: C36.2 DD4.2 R32.2 VD15.1 | length 12.9
  Top Layer w0.55: DD4.2 115.062,37.211 114.681,36.83 114.681,31.948 115.228,31.401 R32.2 C36.2 116.43,29.715 117.165,29.715 117.797,29.083 118.817,29.083 VD15.1
NetC53_1: C53.1 C54.1 G2.2 L5.2 | length 14
  Top Layer w0.55: G2.2 125.349,49.911 132.842,49.911 C54.1 132.977,50.03 136.771,50.03 L5.2
  Bottom Layer w0.55: G2.2 125.385,49.947 126.632,49.947 127.104,50.419 C53.1
NetC56_2: C56.2 DD6.4 | length 7.1
  Top Layer w0.55: C56.2 131.826,88.773 132.583,89.53 DD6.4 ; C56.2@132.08,87.63 C56.2@132.207,87.757
NetDA4_1: DA4.1 R18.1 | length 2.2
  Top Layer w0.55: R18.1 135.941,31.496 DA4.1
NetDA4_3: DA4.3 R20.1 | length 9
  Top Layer w0.55: R20.1 135.898,33.723 137.287,32.334 139.336,32.334 139.828,31.842 139.828,31.521 DA4.3
NetDD2_2: DD2.2 R28.1 | length 4.1
  Top Layer w0.3: R28.1 122.809,66.294 123.099,66.004 DD2.2
NetDD2_3: DD2.3 R27.1 | length 6.4
  Top Layer w0.3: R27.1 120.904,66.04 121.44,65.504 DD2.3
NetDD2_27: DD2.27 R29.2 | length 2.8
  Top Layer w0.3: DD2.27 136.37,62.004 R29.2
NetDD2_39: DD2.39 R30.2 | length 2.5
  Top Layer w0.3: DD2.39 131.417,70.203 R30.2
NetDD2_44: DD2.44 R23.1 | length 2.5
  Top Layer w0.3: R23.1@128.905,70.485 R23.1@128.917,70.473 ; DD2.44 R23.1@128.917,70.251
NetDD3_6: DD3.6 DD5.4 R32.1 VD15.2 | length 16.7
  Top Layer w0.55: DD3.6 117.475,39.649 118.085,39.04 118.085,36.297 116.205,34.417 R32.1 VD15.2 118.999,33.196 119.611,32.584 119.816,32.584 120.396,32.004 121.725,32.004 122.047,32.326 DD5.4
NetDD3_7: DD3.7 DD5.1 | length 15.9
  Top Layer w0.55: DD3.7 118.745,42.037 119.253,42.545 120.523,42.545 121.031,42.037 121.031,37.406 121.353,37.084 124.46,37.084 125.857,35.687 DD5.1
NetDD4_4: DD4.4 DD5.2 DD5.3 | length 9.8
  Top Layer w0.55: DD4.4 122.87,36.261 ; DD5.3 123.317,35.814 122.87,36.261 ; DD5.2 124.587,35.751 124.077,36.261 122.87,36.261
NetDD5_6: DD5.6 R37.1 | length 4.1
  Top Layer w0.55: v1(123.317,27.305) DD5.6
  Bottom Layer w0.7: R37.1 122.555,28.067 v1(123.317,27.305)
NetDD5_7: DD5.7 R36.1 | length 7.2
  Top Layer w0.55: DD5.7 124.646,28.897 124.646,27.627 124.968,27.305 v1(126.238,27.305)
  Bottom Layer w0.7: v1(126.238,27.305) 126.238,28.038 127.539,29.339 R36.1 128.128,29.339 R36.1@128.778,28.689
NetJ1_1: J1.1 R38.1 | length 10.8
  Bottom Layer w0.7: R38.1 119.067,36.941 124.322,36.941 125.222,36.041 J1.1
NetJ1_2: J1.2 R36.2 VD19.1 XS2.2 | length 16.5
  Bottom Layer w0.7: VD19.1 119.507,26.001 119.557,25.951 120.498,25.951 ; XS2.2 120.777,25.672 120.498,25.951 ; R36.2@128.217,32.967 R36.2 127.539,32.639 125.662,30.762 125.372,30.762 J1.2 125.222,26.416 124.757,25.951 120.498,25.951
NetR18_2: R18.2 XS1.2 | length 3.3
  Top Layer w0.55: XS1.2 R18.2@133.731,31.723
NetR19_2: R19.2 VD12.2 | length 3.1
  Top Layer w0.55: R19.2 115.332,52.816 115.332,49.8 VD12.2
NetR20_2: R20.2 R22.2 XS1.3 | length 8.7
  Top Layer w0.55: R22.2 R20.2 131.953,26.77 132.334,26.389 XS1.3
NetR21_2: R21.2 VD13.2 | length 1.8
  Top Layer w0.55: VD13.2 R21.2
NetR22_1: R22.1 VT1.2 | length 2.3
  Top Layer w0.55: VT1.2@130.17,36.052 VT1.2 130.165,33.733 R22.1
NetR24_1: R24.1 R25.2 R26.2 VT1.1 | length 5.7
  Top Layer w0.55: R26.2 128.278,38.065 VT1.1@130.157,38.065 ; VT1.1 VT1.1@130.157,38.065 ; R24.1 R25.2 130.154,40.348 130.154,38.068 VT1.1@130.157,38.065
NetR31_2: R31.2 VD14.2 | length 1.8
  Top Layer w0.55: VD14.2 R31.2
NetR33_2: R33.2 VD17.2 | length 1.7
  Top Layer w0.55: R33.2 140.29,43.929 140.29,42.278 VD17.2
NetR34_2: R34.2 VD18.2 | length 1.9
  Top Layer w0.55: R34.2 VD18.2
NetR37_2: R37.2 R38.2 VD19.2 XS2.1 | length 14.2
  Bottom Layer w0.7: XS2.1 VD19.2 118.237,26.201 117.348,27.09 117.348,30.34 118.223,31.215 R38.2 R38.2@118.618,31.088
  Bottom Layer w1: R38.2 118.618,31.342 118.618,32.434 119.204,33.02 122.299,33.02 R37.2
NetR39_1: R39.1 XP3.1 | length 5.6
  Top Layer w0.55: R39.1 118.872,92.253 XP3.1
NetR40_1: R40.1 XP3.7 XP3.8 | length 5.2
  Top Layer w0.55: XP3.7 XP3.8
  Bottom Layer w0.55: R40.1@128.473,99.5 128.499,99.475 128.499,96.85 XP3.8
NetR40_2: R40.2 SW1.1 | length 15.3
  Bottom Layer w0.55: R40.2 140.712,99.488 141.859,100.635 141.859,104.013 SW1.1
NetR41_1: R41.1 XP3.4 | length 14.8
  Top Layer w0.55: R41.1 116.967,96.291 119.228,98.552 121.717,98.552 XP3.4
NetR42_1: R42.1 XP3.2 | length 3.5
  Bottom Layer w0.55: R42.1 119.761,99.441 120.404,99.441 120.904,98.941 XP3.2
NetSW1_2: SW1.2 XP3.9 XP3.10 | length 16.8
  Top Layer w0.55: XP3.9 XP3.10 131.064,101.854 133.299,104.089 SW1.2
NRST: DD2.18 R39.2 | length 52.7
  Top Layer w0.3: DD2.18 129.413,59.725 129.413,58.166 129.849,57.73 137.033,57.73 137.922,58.619 v1(137.922,59.69)
  Top Layer w0.55: v1(118.872,86.468) R39.2
  Bottom Layer w0.55: v1(118.872,86.468) 118.872,86.106 117.983,85.217 117.983,78.895 125.22,71.658 128.741,71.658 132.327,68.072 136.57,68.072 137.922,66.72 v1(137.922,59.69)
NRST_MC: C43.2 DD2.7 R35.2 XP4.5 | length 36.9
  Top Layer w0.3: 121.793,62.865 122.432,63.504 DD2.7
  Top Layer w0.55: 121.793,62.865 119.126,60.198 116.586,60.198 116.103,60.681 116.103,69.24 120.523,73.66 C43.2 XP4.5 XP4.5@126.492,75.819
  Bottom Layer w0.55: XP4.5 R35.2@126.746,78.137
RS_RX: DD2.13 DD3.2 VD13.1 | length 16.4
  Top Layer w0.3: VD13.1 118.777,51.213 124.841,57.277 125.806,57.277 126.917,58.388 DD2.13
  Top Layer w0.55: DD3.2 118.761,47.26 VD13.1@118.761,49.768
RS_TX: DD2.12 DD3.3 VD12.1 | length 18.2
  Top Layer w0.3: VD12.1 117.348,50.8 123.952,57.404 123.952,60.706 124.165,60.919 ; 124.079,60.833 124.25,61.004 DD2.12
  Top Layer w0.55: VD12.1 117.411,49.721 117.411,47.307 DD3.3
SWCLK: DD2.15 DD2.26 R42.2 | length 73
  Top Layer w0.3: DD2.15 127.917,57.884 128.651,57.15 137.16,57.15 138.811,58.801 v1(138.811,60.96) 135.769,60.96 135.225,61.504 DD2.26
  Bottom Layer w0.55: R42.2@117.729,99.06 117.729,90.805 119.761,88.773 119.761,78.188 ; 119.756,78.183 125.531,72.408 129.052,72.408 132.602,68.858 137.472,68.858 138.811,67.519 v1(138.811,60.96)
SWCLK_MC: DD2.37 XP4.2 | length 8.8
  Top Layer w0.3: DD2.37 132.417,68.536 134.366,70.485 134.366,73.406
  Top Layer w0.55: 134.366,73.406 XP4.2
SWDIO: DD2.25 R29.1 R41.2 | length 41.6
  Top Layer w0.3: DD2.25 134.576,61.004 135.636,59.944 R29.1@136.017,59.944
  Top Layer w0.55: v1(116.967,86.408) R41.2
  Bottom Layer w0.55: v1(116.967,86.408) 116.967,78.74 124.841,70.866 128.397,70.866 131.953,67.31 133.362,67.31 136.754,63.918 v1@136.754,59.817
  other v1: 136.779,59.792
SWDIO_MC: DD2.34 R43.1 XP4.4 | length 25.5
  Top Layer w0.3: DD2.34 135.259,65.504 136.43,66.675 v1(139.786,66.675)
  Bottom Layer w0.55: R43.1 129.302,78.343 129.302,75.835 XP4.4 129.286,73.234 132.912,69.608 137.783,69.608 139.786,67.605 v1(139.786,66.675)
USB_DM: DA4.6 DD2.32 | length 39.1
  Top Layer w0.3: DD2.32 136.019,64.504 136.144,64.379
  Top Layer w0.55: 136.144,64.379 139.71,64.379 142.621,61.468 142.621,40.03 137.953,35.362 DA4.6
USB_DP: DA4.4 DD2.33 | length 40.6
  Top Layer w0.3: DD2.33 136.019,65.004 136.144,65.129
  Top Layer w0.55: 136.144,65.129 140.992,65.129 143.586,62.535 143.586,39.624 139.853,35.891 DA4.4
USB_ReNumn: DD2.38 R26.1 | length 51
  Top Layer w0.3: DD2.38 131.917,68.925 133.223,70.231 v1(133.223,70.358)
  Top Layer w0.55: R26.1 128.27,35.306 128.524,35.052 v1(129.032,35.052)
  Bottom Layer w0.55: v1(129.032,35.052) 130.048,36.068 130.048,48.387 140.843,59.182 140.843,67.691 138.176,70.358 v1(133.223,70.358)
pads on no net: DD2.4 DD2.11 DD2.14 DD2.16 DD2.17 DD2.19 DD2.21 DD2.22 DD2.28 DD2.29 DD2.30 DD2.31 DD2.40 DD2.41 DD2.42 DD2.43 DD2.45 DD2.46 DD4.1 VD19.3 XP3.3 XP4.6

## Polygon pours and split planes (outlines as drawn)
GND1 on Top Layer "Top Layer-GND1" (solid, pour order 58): 122.479,52.832 123.274,53.627 126.441,53.556 126.441,51.587 125.527,50.673 124.384,50.673 124.384,49.225 124.765,48.844 131.851,48.844 133.553,47.142 133.553,46.279 138.76,46.279 138.76,39.954 133.299,39.954 133.299,44.729 131.039,44.729 131.039,39.954 126.086,39.954 126.086,47.981 124.483,47.981 124.485,46.38 123.165,45.085 123.165,43.967 121.717,43.967 121.437,44.247 121.437,46.812 122.479,47.854
GND1 on Top Layer "Top Layer-GND1 1" (solid, remove dead copper, pour order 48): 121.174,84.836 126.568,84.836 127.33,84.074 130.937,84.074 130.937,85.979 138.176,85.979 138.176,87.122 138.938,87.884 138.938,89.154 140.663,89.154 140.787,89.03 140.787,87.905 139.975,87.905 139.954,87.884 139.954,84.866 139.289,84.201 136.144,84.201 136.144,82.296 137.922,80.518 137.922,78.994 135.255,78.994 132.944,76.683 132.944,73.914 131.699,73.914 130.175,72.39 130.175,70.993 128.143,70.993 127.762,70.612 127.762,69.088 126.111,69.088 125.349,68.326 119.253,68.326 118.364,69.215 118.364,70.612 120.523,72.771 127.483,72.771 129.388,74.676 130.708,74.676 130.708,77.191 130.302,77.597 121.184,77.597 121.184,78.101
+3V on Top Layer "Top Layer-+3V 1" (solid, remove dead copper, pour order 34): 126.619,66.802 132.588,66.802 132.588,60.833 132.461,60.706 126.619,60.706
+5 on Top Layer "Top Layer-+5" (solid, pour order 18): 136.398,83.947 136.398,82.804 136.779,82.423 142.621,82.423 143.129,82.931 143.129,90.449 139.954,90.449 139.954,83.947
+3V on Bottom Layer "Bottom Layer-+3V 3" (solid, pour order 44): 131.064,73.787 131.064,72.263 132.461,70.866 140.716,70.866 140.716,92.862 137.262,96.317 135.001,96.317 135.001,91.821 125.36,83.474 125.36,80.011 135.636,80.011 135.636,74.549 131.699,74.549 131.318,74.168
GND1 on Bottom Layer "Bottom Layer-GND1 2" (solid, pour order 66): 115.926,59.944 115.951,52.121 116.586,51.486 120.853,51.486 121.056,51.283 130.048,51.283 131.597,52.832 131.572,52.857 131.572,60.452 119.634,60.452 118.885,59.944
+5 on Bottom Layer "Bottom Layer-+5" (solid, remove dead copper, pour order 60): 132.74,43.409 142.138,52.807 142.748,52.807 142.748,28.473 141.961,27.686 141.935,27.711 135.331,27.711 135.331,29.515 134.696,30.15 132.74,30.15
GND1 on Bottom Layer "Bottom Layer-GND1" (solid, remove dead copper, pour order 56): 128.016,25.629 128.041,25.603 128.041,21.869 128.829,21.082 141.529,21.082 141.986,21.539 141.986,26.848 135.179,26.848 134.925,26.594 134.925,25.502 132.486,25.502 132.029,25.959 132.029,27.813 128.702,27.813 128.041,27.153
GND1 on Bottom Layer "Bottom Layer-GND1 1" (solid, pour order 40): 127.635,59.944 127.889,60.452 131.572,60.452 131.572,62.992 131.775,63.5 132.334,63.5 132.334,66.094 131.508,66.802 127.635,66.802
no net on Bottom Layer "Bottom Layer-No Net 1" (solid, pour order 62): 152.07,37.262
+5V on Bottom Layer "Bottom Layer-+5V" (solid, pour order 28): 116.967,46.609 116.967,43.307 117.475,42.799 117.475,37.973 124.714,37.973 125.984,36.703 125.984,35.56 126.365,35.179 128.143,35.179 129.032,36.068 129.032,45.593 128.524,46.101 116.84,46.101

## Other copper
Top Layer:
  region: 132.417,67.779

## Silkscreen, mask and mechanical layers (free items; w line width, h text height)
Top Overlay:
  circle w1: c138.201,72.796 r0.5
  text "+5U" at 134.696,42.012 h0.8
  text "+3.3V" at 141.173,41.91 h0.8
  text "+5V" at 123.825,37.49 h0.8
Contur:
  the board outline again, w0.2

## Text inside footprints (layer, text, board x,y; h text height)
C33: Bottom Overlay "C" at 118.7,63.023 h0.7
C34: Bottom Overlay "C" at 118.7,64.674 h0.7
C35: Top Overlay "C" at 122.27,46.019 h0.7 r90
C36: Top Overlay "C" at 116.555,28.715 h0.7 r90
C37: Bottom Overlay "C" at 116.631,41.625 h0.7 r180
C38: Bottom Overlay "C" at 131.839,64.231 h0.7 r180
C39: Bottom Overlay "C" at 128.13,61.476 h0.7
C43: Top Overlay "C" at 127.096,72.435 h0.7 r90
C44: Bottom Overlay "C" at 116.599,39.72 h0.7 r180
C45: Bottom Overlay "C" at 132.289,61.476 h0.7
C46: Bottom Overlay "C" at 132.289,65.436 h0.7
C47: Bottom Overlay "C" at 127.68,66.136 h0.7 r180
C48: Bottom Overlay "C" at 127.68,64.231 h0.7 r180
C50: Top Overlay "C" at 127.158,32.245 h0.7 r270
C51: Bottom Overlay "C" at 138.334,27.216 h0.7 r270
C52: Top Overlay "C" at 137.191,84.791 h0.7 r270
C53: Bottom Overlay "C" at 126.904,51.194 h0.7 r270
C55: Top Overlay "C" at 139.096,84.791 h0.7 r270
C56: Top Overlay "C" at 132.176,86.373 h0.7 r90
C57: Top Overlay "C" at 135.986,86.405 h0.7 r90
C58: Bottom Overlay "C" at 126.904,45.733 h0.7 r270
C59: Top Overlay "C" at 133.377,86.855 h0.7 r270
G2: Top Overlay "in" at 127.254,52.324 h1.52 r270; Top Overlay "out" at 127.254,47.752 h1.52 r270; Top Overlay "-" at 125.984,52.578 h0.8 r270; Top Overlay "+" at 125.984,50.038 h0.8 r270; Top Overlay "+" at 125.984,44.958 h0.8 r270; Top Overlay "-" at 125.984,47.498 h0.8 r270
J1: Bottom Overlay "R" at 125.476,31.774 h0.5 r90
R16: Bottom Overlay "R" at 124.187,64.16 h0.5 r180
R17: Bottom Overlay "R" at 123.088,60.662 h0.5 r270
R18: Top Overlay "R" at 134.944,31.909 h0.5 r180
R19: Top Overlay "R" at 116.478,53.086 h0.5 r180
R20: Top Overlay "R" at 131.699,32.885 h0.5 r270
R21: Top Overlay "R" at 121.939,51.816 h0.5 r180
R22: Top Overlay "R" at 129.921,32.885 h0.5 r270
R23: Top Overlay "R" at 129.159,71.069 h0.5 r90
R24: Top Overlay "R" at 132.442,40.105 h0.5
R25: Top Overlay "R" at 128.981,40.105 h0.5
R26: Top Overlay "R" at 128.524,36.911 h0.5 r90
R27: Top Overlay "R" at 121.158,68.275 h0.5 r90
R28: Top Overlay "R" at 123.063,68.275 h0.5 r90
R29: Top Overlay "R" at 136.677,60.789 h0.5 r90
R30: Top Overlay "R" at 131.191,71.393 h0.5 r270
R31: Top Overlay "R" at 132.766,44.196 h0.5 r180
R32: Top Overlay "R" at 115.951,32.563 h0.5 r270
R33: Top Overlay "R" at 139.116,43.688 h0.5
R34: Top Overlay "R" at 123.19,40.31 h0.5 r270
R35: Bottom Overlay "R" at 127,79.775 h0.5 r90
R39: Top Overlay "R" at 118.618,88.697 h0.5 r270
R40: Bottom Overlay "R" at 129.324,99.742 h0.5 r180
R41: Top Overlay "R" at 116.713,88.744 h0.5 r270
R42: Bottom Overlay "R" at 118.897,99.212 h0.5
R43: Bottom Overlay "R" at 130.156,78.613 h0.5 r180
XP3: Top Overlay "10" at 133.477,96.444 h1.52; Top Overlay "1" at 117.904,93.385 h1.52